# Altium PCB Slave.PcbDoc
Units mil, origin at the board's own origin, x right, y up, seen from the top; angles counter-clockwise.
Board outline 3485.03 x 2510.03 mil, 2 copper layers (Top Layer, Bottom Layer); 55 components, 56 nets, 233 pads, 92 vias.
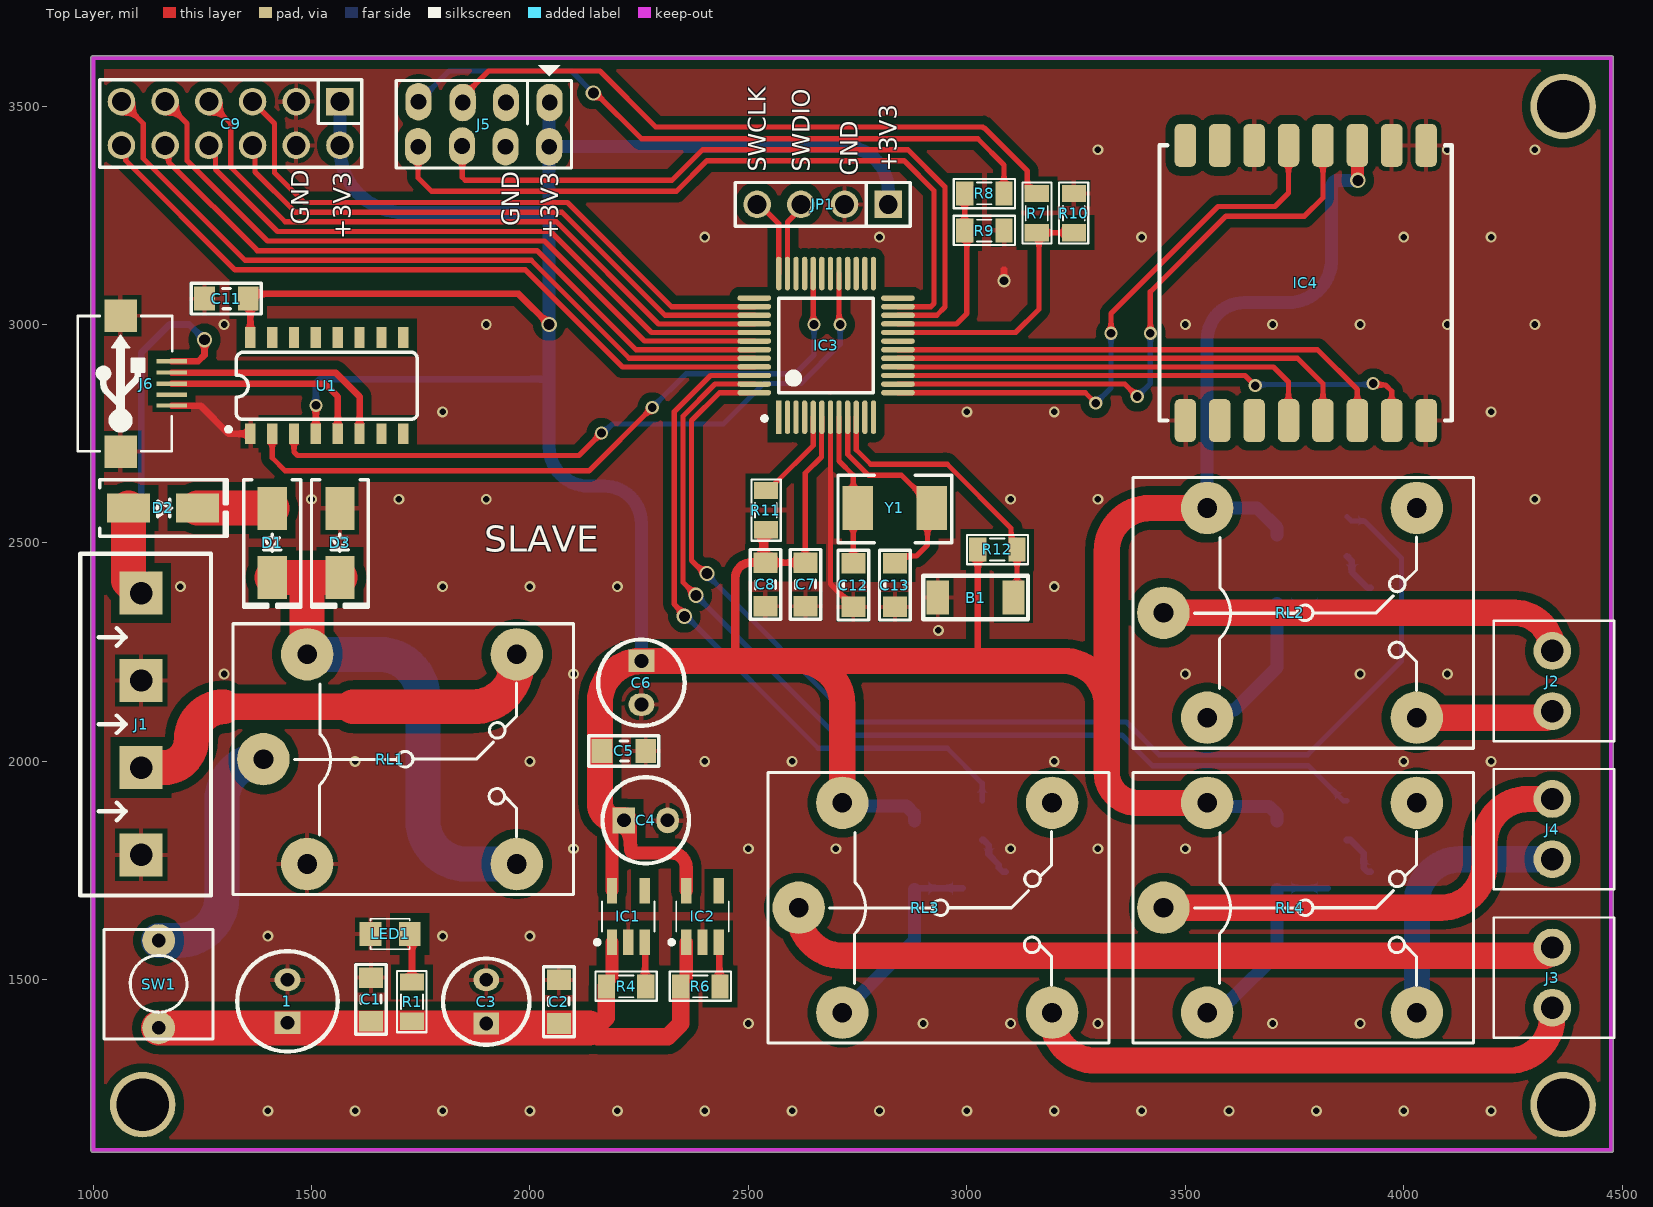
[diagram p0: Top Layer view]
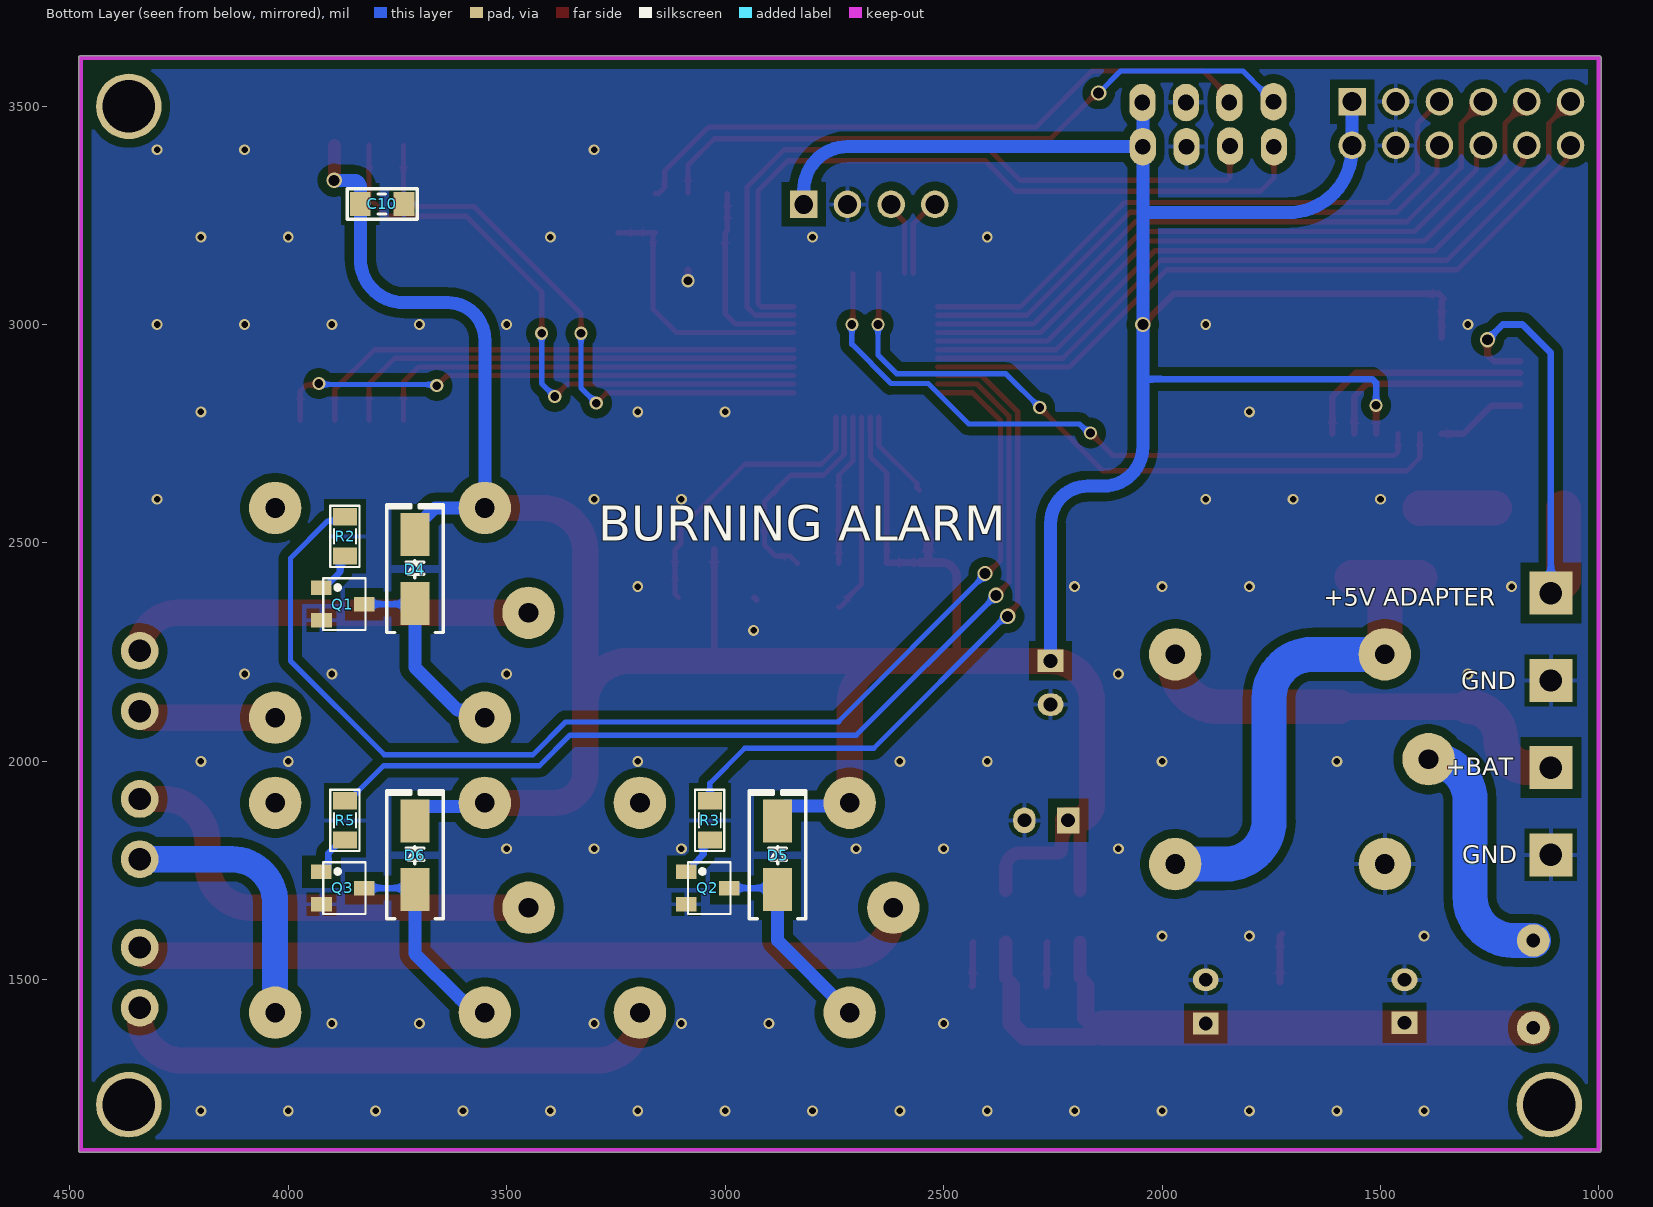
[diagram p1: Bottom Layer view, seen from below]
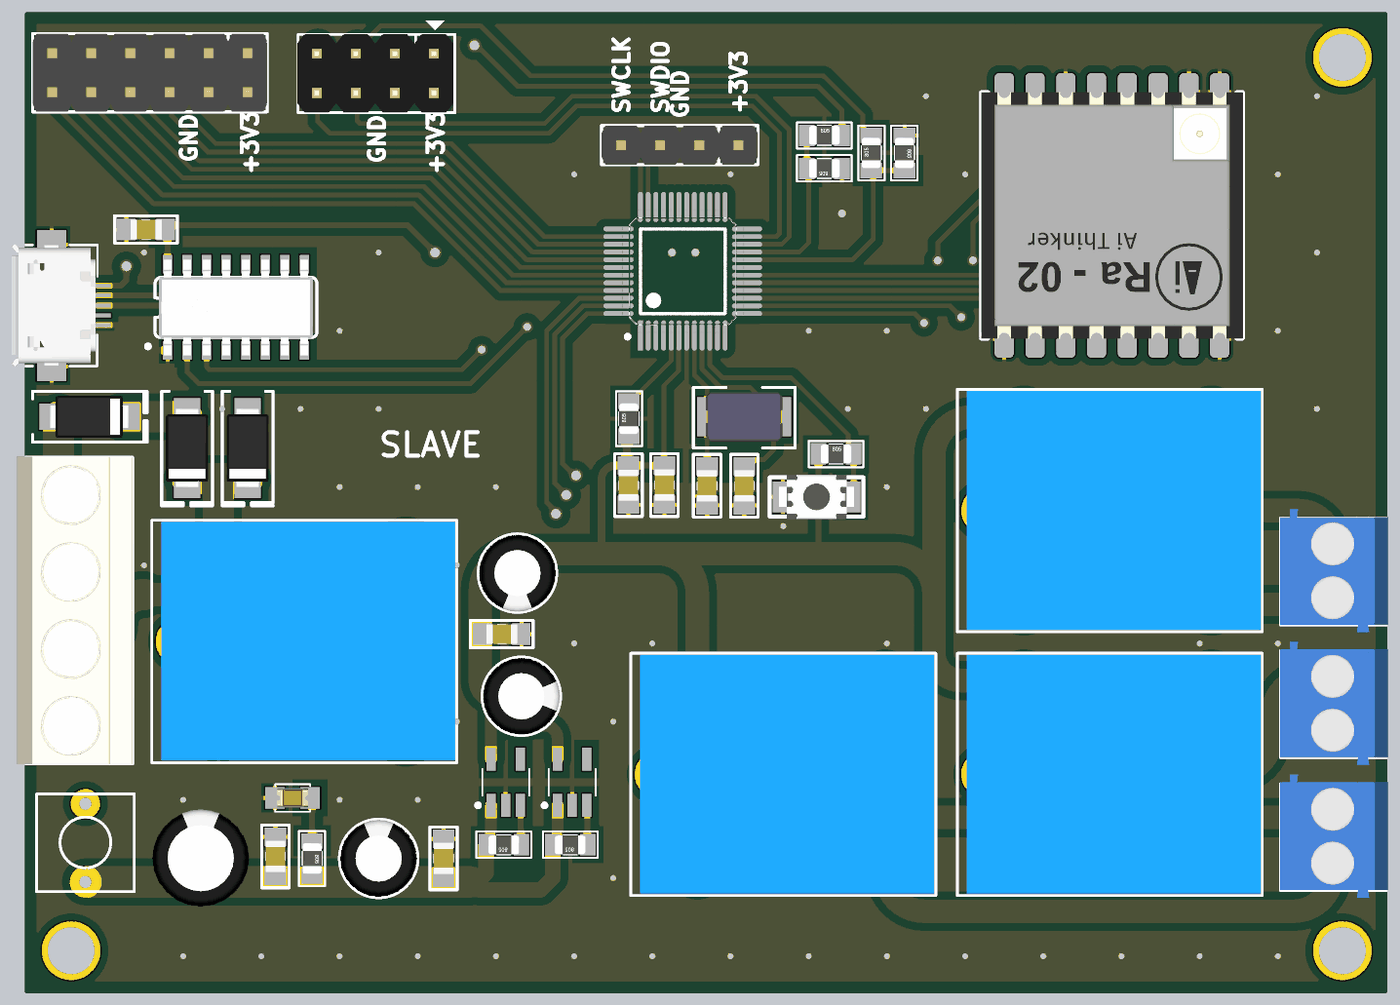
[diagram p2: 3D render of the assembled board from above, using the file's embedded part models]
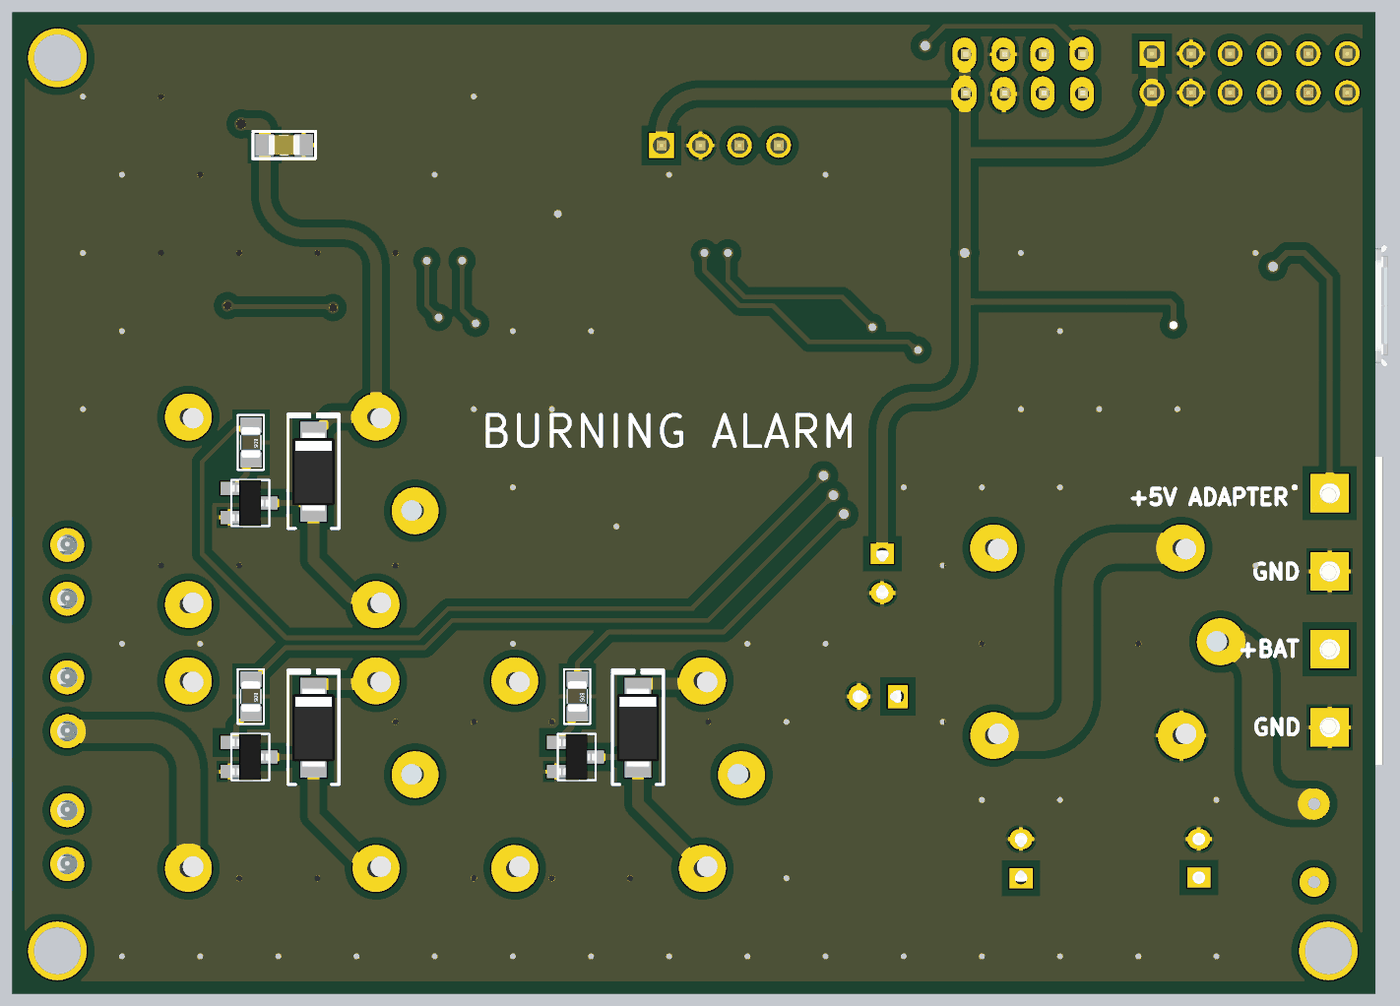
[diagram p3: 3D render of the assembled board from below, using the file's embedded part models]

## Layer stack, top to bottom
Top Solder: solder mask 0.4, Solder Resist, Dk 3.5
Top Layer: signal copper 1.4
Dielectric 1: dielectric 12.6, FR-4, Dk 4.8
Bottom Layer: signal copper 1.4
Bottom Solder: solder mask 0.4, Solder Resist, Dk 3.5

## Board outline
995.65,1112.5 cw(c1000,1115) 994.99,1115 994.99,3610 cw(c1000,3610) 1000,3615.01 4475,3615.01 cw(c4475,3610) 4480.02,3610 4480.02,1110 cw(c4475,1110) 4475,1104.98 1000,1104.98 cw(c1000,1110)

## Design rules (kind name [scope] priority, off if disabled: settings)
Clearance [All] p1: gap=10 ignorepadtopadclearanceinfootprint=FALSE
PolygonConnect [All] p1: thpad.connectstyle=Relief thpad.reliefconductorwidth=10 thpad.reliefentries=4 thpad.polygonreliefangle="90 Angle" thpad.airgapwidth=10 smdpad.connectstyle=Relief smdpad.reliefconductorwidth=10 smdpad.reliefentries=4 smdpad.polygonreliefangle="90 Angle" smdpad.airgapwidth=10 via.connectstyle=Direct via.reliefconductorwidth=10 via.reliefentries=4 via.polygonreliefangle="90 Angle" via.airgapwidth=10
RoutingVias [All] p1: holewidth=25 width=35 viastyle="Through Hole" minholewidth=10 minwidth=25 maxholewidth=100 maxwidth=100
SolderMaskExpansion [All] p1: expansion=4 istentingtop=FALSE
Width [All] p1: maxlimit=100 minlimit=10 preferedwidth=20
30 further rules are at their usual default settings.

## Components (designator, comment, footprint, x,y, rotation, side; value= is the part's Value field where it differs from the comment)
1 "470uF" C8mm 1445,1450.79 r90 top
B1 "Button 3x4x2.5" "Button 3x4x2.5" 3020,2375 r0 top
C1 "100nF" CAP_0805 1635,1455 r90 top value=33p
C2 "100nF" CAP_0805 2065,1450 r90 top value=33p
C3 "100uF" C5mm 1900,1450 r90 top
C4 "100uF" C5mm 2265,1865 r0 top
C5 "100nF" CAP_0805 2215,2025 r0 top value=33p
C6 "100uF" C5mm 2255,2180 r270 top
C7 "4.7uF" CAP_0805 2630,2405 r90 top value=33p
C8 "100nF" CAP_0805 2540,2405 r270 top value=33p
C9 "JP6x2" JP6-D2T 1315,3460 r180 top
C10 "100nF" CAP_0805 3785,3275 r0 bottom value=33p
C11 "100nF" CAP_0805 1305,3060 r0 top value=33p
C12 "22pF" CAP_0805 2741.11,2403.54 r270 top value=33p
C13 "22pF" CAP_0805 2836.11,2403.54 r270 top value=33p
D1 "SS34 Diode 3A 40V" "DIODE SMA" 1410,2500 r270 top
D2 "SS34 Diode 3A 40V" "DIODE SMA" 1160,2580 r0 top
D3 "M7" "DIODE SMA" 1565,2500 r270 top
D4 "M7" "DIODE SMA" 3710,2440 r90 bottom
D5 "M7" "DIODE SMA" 2880,1785 r90 bottom
D6 "M7" "DIODE SMA" 3710,1785 r90 bottom
IC1 "RT9013" SOT23-5 2225,1645 r90 top
IC2 "RT9013" SOT23-5 2395,1645 r90 top
IC3 "STM32G0" STM32G0 2680,2950 r90 top
IC4 "LoRa-02" LoRa-02 3775.63,3095.04 r270 top
J1 "KF4" KF4-5.08 1110,2385 r270 top
J2 "KF2" KF2-3.5 4340,2183.9 r90 top
J3 "KF2" KF2-3.5 4340,1505 r90 top
J4 "KF2" KF2-3.5 4340,1845 r90 top
J5 "Connector 4x2" JP4x2 1894.5,3458.5 r180 top
J6 "USB-5" USB-M1 1180,2864.41 r90 top
JP1 "JP 1x4 2.54" "JP 1x4 DT" 2820,3275 r180 top
LED1 "LED" LED-0805-Red 1725,1605 r180 top value="LED 3 ly Single Colour"
Q1 "C1815" SOT23D 3875,2360 r270 bottom
Q2 "C1815" SOT23D 3040,1710 r270 bottom
Q3 "C1815" SOT23D 3875,1710 r270 bottom
R1 "1k" RES-SMD-0805 1730,1450 r270 top
R2 "1k" RES-SMD-0805 3870,2515 r270 bottom
R3 "1k" RES-SMD-0805 3035,1865 r270 bottom
R4 "10k" RES-SMD-0805 2220,1485 r180 top
R5 "1k" RES-SMD-0805 3870,1865 r270 bottom
R6 "10k" RES-SMD-0805 2390,1485 r180 top
R7 "10k" RES-SMD-0805 3160,3255 r90 top
R8 "10k" RES-SMD-0805 3040,3300 r0 top
R9 "20k" RES-SMD-0805 3040,3215 r180 top
R10 "20k" RES-SMD-0805 3245,3255 r270 top
R11 "10k" RES-SMD-0805 2540,2575 r90 top
R12 "10k" RES-SMD-0805 3070,2485 r0 top
RL1 "Relay 10A/12V" "RELAY 5" 1715,2005 r0 top value="Relay SPDT, 10A, 12V"
RL2 "Relay 10A/12V" "RELAY 5" 3775,2340 r0 top value="Relay SPDT, 10A, 12V"
RL3 "Relay 10A/12V" "RELAY 5" 2940,1665 r0 top value="Relay SPDT, 10A, 12V"
RL4 "Relay 10A/12V" "RELAY 5" 3775,1665 r0 top value="Relay SPDT, 10A, 12V"
SW1 "SW" SW2 1150,1590 r270 top value="SW chip 2 pin"
U1 "CH340C" SO016 1535,2860 r0 top
Y1 "8Mhz" "Thach Anh 2 chan SMD5032" 2835,2580 r180 top value=4Mhz

## Footprints (in the part's own frame and the unit in brackets; to place one, negate y for a bottom-side part, rotate by r counter-clockwise, add the part's x,y. Pads: shape width x height; smd on the part's side, far side on the other; paste and mask are expansions set on the pad)
"Button 3x4x2.5" [mm]
  rect 1.3x2 smd: 1(-2.2,0) 2(2.2,0)
  silkscreen extent -3.05,-1.27 3.05,1.27, body extent -2.45,-1.45 2.45,1.45, height 2
C5mm [mm]
  rect 1.3x1.5 hole 0.8: 1(-1.27,0)
  oval 1.3x1.5 hole 0.8: 2(1.27,0)
  silkscreen extent -2.51,-2.51 2.51,2.51, body extent -2.5,-2.5 2.49,2.5, height 11.01
C8mm [mm]
  rect 1.3x1.5 hole 0.8: 1(-1.25,0)
  oval 1.3x1.5 hole 0.8: 2(1.25,0)
  silkscreen extent -2.92,-2.92 2.92,2.92, body extent -3.15,-3.15 3.16,3.15, height 11.51
CAP_0805 [mm]
  rect 1.2x1.4 smd: 1(-1.27,-0.025) 2(1.27,-0.025)
  silkscreen extent -2.03,-0.91 2.03,0.86, body extent -1.01,-0.66 1.01,0.61, height 0.61
"DIODE SMA" [mm] "SMA"
  rect 2.5x1.7 smd: 1(-2,0) 2(2,0)
  silkscreen extent -3.68,-1.65 3.75,1.65, body extent -2.6,-1.37 2.6,1.37, height 2.4
JP4x2 [mil] "Connector 4x2"
  oval 60x86 hole 36: 1(-150.5,-49.5) 2(-50.5,-49.5) 3(48.5,-49.5) 4(149.5,-51.5) 5(-149.5,51.5) 6(-49.5,51.5) 7(50,50) 8(150.5,51.5)
  silkscreen extent -201,-135 200,101, body extent -197,-100 203,100, height 335
JP6-D2T [mm] "12 pins, dual pin, straight, gold plating"
  rect 1.6x1.6 hole 1.1: 1(-6.35,-1.27)
  round 1.6 hole 1.1: 2(-3.81,-1.27) 3(-1.27,-1.27) 4(1.27,-1.27) 5(3.81,-1.27) 6(6.35,-1.27) 7(6.35,1.27) 8(3.81,1.27) 9(1.27,1.27) 10(-1.27,1.27) 11(-3.81,1.27) 12(-6.35,1.27)
  silkscreen extent -7.62,-2.54 7.62,2.54, body extent -7.62,-2.54 7.62,2.54, height 8.55
"JP 1x4 DT" [mm] "4 pins, 1 row, straight, gold plating"
  rect 1.6x1.6 hole 1.1: 1(0,0)
  round 1.6 hole 1.1: 2(2.54,0) 3(5.08,0) 4(7.62,0)
  silkscreen extent -1.27,-1.27 8.89,1.27, body extent -1.27,-1.27 8.89,1.27, height 8.54
KF2-3.5 [mm] "3,50mm - modular - blue - Horizontal wire entry - Pressure clamp - 8,4mm height - 02p"
  round 2.2 hole 1.3: 1(-1.75,0) 2(1.75,0)
  silkscreen extent -3.5,-3.6 3.5,3.4, body extent -3.95,-3.6 4.05,3.4, height 8.41
KF4-5.08 [mm]
  rect 2.5x2.5 hole 1.3: 1(0,0) 2(5.08,0) 3(10.147,0) 4(15.215,0)
  silkscreen extent -2.29,-3.53 17.58,4.06, body extent -2.36,-3.43 17.64,4.07, height 10
LED-0805-Red [mil]
  rect 50x55 smd: 1(0,0) 2(90,0)
  silkscreen extent 0,-35 90,35, body extent 5,-25 85,25, height 43
LoRa-02 [mm]
  rrect50% 2.5x1.25 smd: 1(-8,7) 2(-8,5) 2(-8,-3) 3(-8,3) 4(-8,1) 5(-8,-1) 7(-8,-5) 8(-8,-7) 9(8,-7) 10(8,-5) 11(8,-3) 12(8,-1) 13(8,1) 14(8,3) 15(8,5) 16(8,7)
  silkscreen extent -8,-8.5 8,8.5, body extent -8,-8.5 8,8.5, height 3.03
"RELAY 5" [mil] "Reley DPDT, 8 pin, 1A, W400mil, L800mil,H 300mil"
  round 120 hole 45: 1(-325,0) 2(255,240) 3(255,-240) 4(-225,-240) 5(-225,240)
  silkscreen extent -395,-310 385,310, body extent -371,-304 381,306, height 602
RES-SMD-0805 [mil]
  rect 39.37x55 smd: 1(-45,0) 2(45,0)
  silkscreen extent -70,-34 70,33, body extent -39,-25 39,25, height 31
SO016 [mm]
  rect 0.6x1.2 smd: 1(-4.445,-2.8) 2(-3.175,-2.8) 3(-1.905,-2.8) 4(-0.635,-2.8) 5(0.635,-2.8) 6(1.905,-2.8) 7(3.175,-2.8) 8(4.445,-2.8) 9(4.445,2.8) 10(3.175,2.8) 11(1.905,2.8) 12(0.635,2.8) 13(-0.635,2.8) 14(-1.905,2.8) 15(-3.175,2.8) 16(-4.445,2.8)
  silkscreen extent -5.84,-2.67 5.26,1.95, body extent -4.99,-3.13 4.99,3.1, height 1.58
SOT23-5 [mm] "SOT23, 5-Leads, Body 3.0x3.0mm (max), Pitch 0.95mm, IPC Medium Density"
  rect 1.5x0.6 smd: 1(-1.5,0.95) 2(-1.5,0) 3(-1.5,-0.95) 4(1.5,-0.95) 5(1.5,0.95)
  silkscreen extent -1.62,-1.52 0.87,1.92, body extent -1.75,-1.52 1.75,1.53, height 1.45
SOT23D [mm] "SOT 23C - 1-3-2 - BCE"
  rect 0.85x1.2 smd: 1(-0.95,-1.25) 2(0.94,-1.245) 3(0,1.25)
  silkscreen extent -1.5,-1.14 1.5,1.32, body extent -1.5,-1.17 1.5,1.33, height 1.06
STM32G0 [mm]
  rect 1.955x0.312 smd paste+0 mask+0: 1(-4.12,2.803)
  rrect100% 1.955x0.312 smd paste+0 mask+0: 2(-4.12,2.303) 3(-4.12,1.803) 4(-4.12,1.303) 5(-4.12,0.803) 6(-4.12,0.303) 7(-4.12,-0.197) 8(-4.12,-0.697) 9(-4.12,-1.197) 10(-4.12,-1.697) 11(-4.12,-2.197) 12(-4.12,-2.697) 25(4.23,-2.697) 26(4.23,-2.197) 27(4.23,-1.697) 28(4.23,-1.197) 29(4.23,-0.697) 30(4.23,-0.197) 31(4.23,0.303) 32(4.23,0.803) 33(4.23,1.303) 34(4.23,1.803) 35(4.23,2.303) 36(4.23,2.803)
  rrect100% 0.312x1.955 smd paste+0 mask+0: 13(-2.695,-4.122) 14(-2.195,-4.122) 15(-1.695,-4.122) 16(-1.195,-4.122) 17(-0.695,-4.122) 18(-0.195,-4.122) 19(0.305,-4.122) 20(0.805,-4.122) 21(1.305,-4.122) 22(1.805,-4.122) 23(2.305,-4.122) 24(2.805,-4.122) 37(2.805,4.228) 38(2.305,4.228) 39(1.805,4.228) 40(1.305,4.228) 41(0.805,4.228) 42(0.305,4.228) 43(-0.195,4.228) 44(-0.695,4.228) 45(-1.195,4.228) 46(-1.695,4.228) 47(-2.195,4.228) 48(-2.695,4.228)
  silkscreen extent -4.32,-2.7 2.81,3.76, body extent -5.6,-5.6 5.71,5.71, height 0.25
SW2 [mil] "SW button 2pin, 250x 250 mil"
  round 75 hole 31: 1(0,0) 2(200,0)
  silkscreen extent -25,-125 225,125
"Thach Anh 2 chan SMD5032" [mil] "DO-214-AA/SMB; 2 C-Bend Leads; Body 5.3 x 3.6 mm, inc. leads (LxW)"
  rect 70x100 smd: 1(-85,0) 2(85,0)
  silkscreen extent -130,-75 130,80, body extent -98,-63 98,63, height 51
USB-M1 [mil]
  rect 10x70 smd: 1(51.18,0) 2(25.59,0) 3(0,0) 4(-25.59,0) 5(-50,0)
  rect 74.8x74.8 smd: 5(-155.51,116.84) 5(155.51,116.84)
  silkscreen extent -155,-1 155,215, body extent -157,5 158,218, height 107

## Part data
1: library part "Cap Pol", "470uF 16V", LatestRevisionDate=17-Jul-2002, LatestRevisionNote="Re-released for DXP Platform.", PackageReference=POLAR0.8, Published=8-Jun-2000, Publisher="Altium Limited"
C1 C2 C5 C7 C8 C10 C11 C12 C13: library part CapSMD, "Capacitor", LatestRevisionDate=17-Jul-2002, LatestRevisionNote="Re-released for DXP Platform.", PackageReference=RAD-0.3, Published=8-Jun-2000, Publisher="Altium Limited"
C3 C4 C6: library part "Cap Pol", "100uF 16V", LatestRevisionDate=17-Jul-2002, LatestRevisionNote="Re-released for DXP Platform.", PackageReference=POLAR0.8, Published=8-Jun-2000, Publisher="Altium Limited"
C9: "WR-PHD 2.54 mm Dual Socket Header", Manufacturer="W¨¹rth Elektronik eiSos GmbH", partNo=61301221821, ComponentLink1 Description=Manufacturer, ComponentLink1URL=http://www.we-online.com, ComponentLink2 Description=Datasheet, ComponentLink2URL=http://katalog.we-online.de/em/datasheet/6130xx21821.pdf, Created by="Karrer Zheng", Created Date="29 March 2013", NoPins=12
D1 D2 D3 D4 D5 D6: library part "Diode M7 ( 4007 )", "Dán", Chung_Loai=Dán, Don_Vi=Con, Ma_Hang=MH000944, Ten_Linh_Kien="Diode M7 1N4007 SMD 1A 1000V"
IC1 IC2: "RT9013-33GB IC REG LINEAR 3.3V 500mA SOT23-5"
J1: Manufacturer="W¨¹rth Elektronik eiSos GmbH", partNo=691133710004, ComponentLink1 Description=Manufacturer, ComponentLink1 URL=http://www.we-online.com, ComponentLink2 Description=Datasheet, ComponentLink2 URL=http://katalog.we-online.de/em/datasheet/6911337100xx.pdf, Created by="Baojun Chen", Created Date=4-Aug-15, NoPins=4
J2 J3 J4: Manufacturer="Würth Elektronik eiSos GmbH", partNo=691103110002, ComponentLink1 Description=Manufacturer, ComponentLink1URL=http://www.we-online.com, ComponentLink2 Description=Datasheet, ComponentLink2URL=http://katalog.we-online.de/em/datasheet/6911031100xx.pdf, Created by="Karrer Zheng", Created Date="29 October 2013", NoPins=2
J5: library part JP4x2
J6: Manufacturer=FCI, Manufacturer Part Number=10118193-0001LF, Supplier Part Number 1=609-4616-1-ND, .Checked PCB=RF, .Checked SCH=MM, .Creator=MM, Category="Connectors, Interconnects", ComponentLink1Description=http://portal.fciconnect.com/Comergent//fci/drawing/10118193.pdf, ComponentLink1URL=http://portal.fciconnect.com/Comergent//fci/drawing/10118193.pdf, Connector Type="USB - micro B", Features="Shielded, Solder Retention", Gender=Receptacle, Ingress Protection=-, Mounting Type="Surface Mount, Right Angle, Horizontal", Number of Contacts=5, Packaging="Cut Tape (CT)", Pricing 1="1=0.46, 10=0.433, 25=0.3712, 50=0.3156, 100=0.3032, 250=0.27224, 500=0.25988 (USD)", RoHS="RoHS Compliant", Specifications="USB 2.0", Stock 1=28642, Supplier 1=Digi-Key
JP1: library part "JP 1x4 2.54 Duc Thang", "Cắm", Chung_Loai=Cắm, Don_Vi=Con, Ma_Hang=MH000903, Ten_Linh_Kien="Jump Đơn Đực 2.54MM 1x40P Thẳng 11MM"
LED1: "LED Single colour Green and Red"
Q1 Q2 Q3: library part 2SC1815, "NPN 600mW, ECB"
R1 R2 R3 R4 R5 R6 R7 R8 R9 R10 R11 R12: library part "Resistor - SMD", "Resistor", Manufacturer="Generic Components", Class=Passive, Published=08/06/2000, Publisher="Altium Hobart Technology Centre"
RL1 RL2 RL3 RL4: library part "Relay 5", "Relay SPDT,10A - 12VDC 5 Pin"
SW1: library part SW2, "Switch button 2 pin"
U1: "USB to serial chip CH340", Package=Package, Availability=Unavailable, Check_prices=https://www.snapeda.com/parts/CH340C/WCH/view-part/5428851/?ref=eda, MF=WCH, MP=CH340C, Price=None, SnapEDA_Link=https://www.snapeda.com/parts/CH340C/WCH/view-part/5428851/?ref=snap
Y1: library part "Thach Anh 2 chan SMD 5032", "Crystal For all Crystal 2pin."

## Free pads (board coordinates)
  round 150 hole 120: 0(1113.47,1214.08) 0(4365,1214.08) 0(4365,3499.08)

## Via types
v1: diameter 25, hole 15, Top Layer to Bottom Layer, tented both sides, 73 vias
v2: diameter 30, hole 20, Top Layer to Bottom Layer, tented both sides, 12 vias
v3: diameter 35, hole 25, Top Layer to Bottom Layer, tented both sides, 7 vias

## Nets (pads, with @x,y where several pads share a name; then routed paths per layer and width w, separated by ;. In a path a pad name is that pad's centre, name@x,y a point inside that pad or via, vN(x,y) a via of type N, cw(c..) or ccw(c..) an arc to the next point about the centre after c; other vN are vias at no path point)
+3.3V: C4.1 C5.1 C6.1 C7.2 C8.1 C9.1 C9.12 C10.2 C11.2 D4.2 D5.2 D6.2 IC1.5 IC2.5 IC3.6 IC4.3 J5.1 J5.5 JP1.1 R11.1 R12.1 RL2.5 RL3.5 RL4.5 U1.4 U1.16 | length 10624.4
  Top Layer w12: C7.2 2630,2456 2630,2660 2667,2697 2667,2754.29 2668.07,2755.36 IC3.6
  Top Layer w15: U1.16 1360,3054 C11.2 1366,3070 1974,3070 v3(2044,3000) ; U1.4 v2(1510,2815) ; C8.1@2554,2455 C7.2@2630,2455 ; 3025,2230 R12.1
  Top Layer w20: 2475,2230 cw(c2475,2235) 2470,2235 2470,2420 cw(c2505,2420) 2505,2455 C8.1@2554,2455 ; C8.1 2535,2459 2535,2525 R11.1
  Top Layer w30: IC1.5 2187.6,1837.6 cw(c2215,1837.6) C4.1 cw(c2215,1850) 2230,1850 2230,1800 ccw(c2240,1800) 2240,1790 2325,1790 cw(c2325,1757.4) 2357.6,1757.4 IC2.5 ; IC4.3 3893.74,3331.26 ccw(c3895,3331.26) v3(3895,3330)
  Top Layer w60: C5.1@2160,2019 2160,1904.08 ccw(c2199.08,1904.08) 2199.08,1865 C4.1 ; C5.1@2160,2024 2160,2135 cw(c2255,2135) C6.1 2475,2230 2615,2230 ; C4.1@2198.84,1865.25 C4.1@2214.98,1865.25 ; RL3.5 2715,2130 ccw(c2615,2130) 2615,2230 ; RL4.5 3390,1905 cw(c3390,1975) 3320,1975 3320,2130 ; RL2.5 3420,2580 ccw(c3420,2480) 3320,2480 3320,2130 ; 2615,2230 3025,2230 3220,2230 cw(c3220,2130) 3320,2130
  Bottom Layer w15: v2(1510,2815) 1510,2866.21 1518.79,2875 2044,2875
  Bottom Layer w30: C9.12 C9.1 ; C9.12@1565.12,3409.99 ccw(c1711.61,3402.67) 1711.61,3256 2044,3256 ; J5.1 ccw(c2045,3507) 2044,3507 J5.5 ; C6.1 2255,2545 ccw(c2170,2545) 2170,2630 2134,2630 cw(c2134,2720) 2044,2720 2044,2875 v3(2044,3000) 2044,3256 ; RL3.5 2722.05,1897.95 2861.54,1897.95 2880,1879.49 D5.2 ; JP1.1 2820,3307 ccw(c2720,3307) 2720,3407 J5.5 ; RL4.5 3557.95,1897.05 3691.54,1897.05 3710,1878.58 D6.2 ; D4.2 3710,2534.49 3664.49,2580 RL2.5 3550,2965 cw(c3635,2965) 3635,3050 3735,3050 ccw(c3735,3150) 3835,3150 C10.2 3835,3315 cw(c3850,3315) 3850,3330 v3(3895,3330) ; 2044,3256 J5.5
+4.2V: D1.2 D3.2 RL1.3 RL1.5 | length 1205.4
  Top Layer w80: D1.2 1490,2421.26 ; RL1.5 1490,2421.26 ; D3.2 1490,2421.26
  Bottom Layer w80: RL1.5 1655,2245 cw(c1655,2145) 1755,2145 1755,1865 ccw(c1855,1865) 1855,1765 RL1.3
+5: D2.1 J1.1 J6.1 | length 1059.3
  Top Layer w15: J6.1 1240.59,2915.59 1255,2930 v3(1255,2965)
  Top Layer w80: D2.1 1081.26,2413.74 J1.1
  Bottom Layer w15: J1.1 1110,2935 1175,3000 1220,3000 v3(1255,2965)
+VBAT: J1.3 RL1.2 | length 1016.7
  Top Layer w60: 1300,2125 1595,2125
  Top Layer w80: J1.3 1160.5,1985.5 ccw(c1160.5,2050) 1225,2050 cw(c1300,2050) 1300,2125 ; 1595,2125 1870,2125 ccw(c1870,2225) 1970,2225 RL1.2
AHT10_SCL: IC3.22 J5.7 | length 1634.3
  Top Layer w12: J5.7 1845,3408 1845,3337.03 1852.03,3330 2325,3330 2395,3400 2865,3400 2950,3315 2950,3040 2931.06,3021.06 IC3.22
AHT10_SDA: IC3.23 J5.8 | length 1666.2
  Top Layer w12: J5.8 1744,3336 1775,3305 2335,3305 2405,3375 2855.97,3375 2925,3305.97 2925,3047.78 2917.97,3040.75 IC3.23
CH340_RXD: IC3.29 U1.3 | length 1563.1
  Top Layer w12: U1.3 1460,2708.14 1468,2700.14 2112.16,2700.14 v2(2163.51,2751.49) ; IC3.29 2707.5,3116.5 2707.5,3002.5 v2(2710,3000)
  Bottom Layer w12: v2(2163.51,2751.49) 2168.16,2751.49 2189.17,2772.5 2442.5,2772.5 2535,2865 2620,2865 2710,2955 v2(2710,3000)
CH340_TXD: IC3.32 U1.2 | length 1604.2
  Top Layer w12: U1.2 1410,2695 1440,2665 2135,2665 v2(2280,2810) ; IC3.32 2648.39,3001.61 v2(2650,3000)
  Bottom Layer w12: v2(2280,2810) 2357,2887 2607,2887 2650,2930 v2(2650,3000)
D_N: J6.2 U1.6 | length 538
  Top Layer w15: J6.2 1555,2890 1610,2835 U1.6
D_P: J6.3 U1.5 | length 477.4
  Top Layer w15: J6.3 1530.59,2864.41 1560,2835 U1.5
GND: 1.2 B1.1 C1.2 C2.2 C3.2 C4.2 C5.2 C6.2 C7.1 C8.2 C9.2 C9.11 C10.1 C11.1 C12.2 C13.2 D3.1 IC1.2 IC2.2 IC3.7 IC4.1 IC4.2 IC4.9 IC4.16 J1.2 J1.4 J5.2 J5.6 J6.5 JP1.2 LED1.2 Q1.2 Q2.2 Q3.2 R9.1 R10.1 RL1.4 U1.1 | length 697.1
  Top Layer w12: IC3.7 2687.76,2405.89 2718.55,2375.09 2718.55,2371.16 2736.17,2353.54 C12.2
  Top Layer w15: J6.5@1180,2814.41 1245.59,2814.41 1310.24,2749.76 U1.1 ; B1.1@2928.39,2370 B1.1 ; v2(3085,3100) 3085,3125
  other v1: 1400,1200 1600,1200 1800,1200 2000,1200 2200,1200 2400,1200 2600,1200 2800,1200 3000,1200 3200,1200 3400,1200 3600,1200 3800,1200 4000,1200 4200,1200 2500,1400 2900,1400 3100,1400 3300,1400 3700,1400 3900,1400 1400,1600 1800,1600 2000,1600 2100,1800 2500,1800 2700,1800 3100,1800 3300,1800 3500,1800 1600,2000 2000,2000 2400,2000 2600,2000 3200,2000 4000,2000 4200,2000 1300,2200 2100,2200 3500,2200 3900,2200 4100,2200 2935,2300 1200,2400 1800,2400 2000,2400 2200,2400 3200,2400 1500,2600 1700,2600 1900,2600 3100,2600 3300,2600 4300,2600 1800,2800 3000,2800 3200,2800 4200,2800 1300,3000 1900,3000 3500,3000 3700,3000 3900,3000 4100,3000 4300,3000 2400,3200 2800,3200 3400,3200 4000,3200 4200,3200 3300,3400 4100,3400 4300,3400
IO0: C9.3 IC3.38 | length 1409
  Top Layer w12: C9.3 1415,3460 1415,3347.23 1483.23,3279 2086,3279 2324.25,3040.75 IC3.38
IO1: C9.10 IC3.39 | length 1341.8
  Top Layer w12: C9.10 1370.61,3404.39 1370.61,3349.39 1463,3257 2073,3257 2308.94,3021.06 IC3.39
IO2: C9.4 IC3.40 | length 1517.8
  Top Layer w12: C9.4 1315,3460 1315,3360 1440,3235 2060.46,3235 2294.08,3001.38 IC3.40
IO3: C9.9 IC3.41 | length 1449.4
  Top Layer w12: C9.9 1265,3396.2 1280,3381.2 1280,3355 1422,3213 2047,3213 2278.31,2981.69 IC3.41
IO4: C9.5 IC3.42 | length 1625.3
  Top Layer w12: C9.5 1215,3460 1215,3375 1399,3191 2032.89,3191 2261.88,2962.01 IC3.42
IO5: C9.8 IC3.43 | length 1559.8
  Top Layer w12: C9.8 1173,3402 1173,3372 1376,3169 2016,3169 2242.68,2942.32 IC3.43
IO6: C9.6 IC3.44 | length 1738.7
  Top Layer w12: C9.6 1115,3460 1115,3380 1348,3147 2003,3147 2227.36,2922.64 IC3.44
IO7: C9.7 IC3.45 | length 1673.2
  Top Layer w12: C9.7 1074.76,3400.24 1074.76,3375.24 1325,3125 1990,3125 2212.05,2902.95 IC3.45
LORA_IO0: IC3.13 IC4.5 | length 1311.5
  Top Layer w12: IC3.13 3271.1,2843.9 v2(3295,2820) ; v2(3330,2980) 3330,3025 3575,3270 3705,3270 3736.26,3301.26 IC4.5
  Bottom Layer w12: v2(3295,2820) 3330,2855 v2(3330,2980)
LORA_MISO: IC3.17 IC4.13 | length 1081.1
  Top Layer w12: IC3.17 3756.62,2922.64 3815,2864.26 IC4.13
LORA_MOSI: IC3.18 IC4.14 | length 1160.3
  Top Layer w12: IC3.18 3802.68,2942.32 3893.74,2851.26 IC4.14
LORA_NSS: IC3.15 IC4.15 | length 1216.4
  Top Layer w12: IC3.15 3636.6,2883.27 3659.87,2860 v2(3660,2860) ; v2(3930,2865) 3933.44,2861.56 3958.22,2861.56 3972.48,2847.29 IC4.15
  Bottom Layer w12: v2(3660,2860) 3662.5,2862.5 3927.5,2862.5 v2(3930,2865)
LORA_RST: IC3.14 IC4.4 | length 1416
  Top Layer w12: IC3.14 3361.42,2863.58 v2(3390,2835) ; v2(3420,2980) 3420,3075 3593,3248 3773,3248 3815,3290 IC4.4
  Bottom Layer w12: v2(3390,2835) 3420,2865 v2(3420,2980)
LORA_SCK: IC3.16 IC4.12 | length 996.8
  Top Layer w12: IC3.16 3702.05,2902.95 3736.26,2868.74 IC4.12
MQ7_ADC: IC3.21 R8.1 R9.2 | length 444.6
  Top Layer w12: IC3.21 2976.38,3001.38 3000,3025 3000,3210 R9.2 R8.1
MQ7_EXTI: IC3.20 R7.1 R10.2 | length 606.8
  Top Layer w12: IC3.20 3111.69,2981.69 3165,3035 3165,3205 R7.1 R10.2
NetD1_1: D1.1 D2.2 | length 172
  Top Layer w80: D2.2 1408.74,2580 cw(c1408.74,2578.74) D1.1
NetD4_1: D4.1 Q1.3 RL2.4 | length 470.2
  Bottom Layer w15: D4.1 3711.26,2360 Q1.3
  Bottom Layer w30: RL2.4 3567.22,2117.22 3612.22,2117.22 3710,2215 D4.1
NetD5_1: D5.1 Q2.3 RL3.4 | length 461.9
  Bottom Layer w15: D5.1 2883.74,1710 Q2.3
  Bottom Layer w30: RL3.4 2880,1590 D5.1
NetD6_1: D6.1 Q3.3 RL4.4 | length 479.5
  Bottom Layer w15: D6.1 3713.74,1710 Q3.3
  Bottom Layer w30: RL4.4 3574.35,1425 3606.1,1456.75 3606.75,1456.75 3710,1560 D6.1
NetIC1_3: IC1.3 R4.1 | length 102
  Top Layer w15: IC1.3 2263.7,1584.65 2263.7,1486.3 R4.1
NetIC2_3: IC2.3 R6.1 | length 102
  Top Layer w15: IC2.3 2433.7,1584.65 2433.7,1486.3 R6.1
NetIC3_5: IC3.5 R11.2 | length 206.5
  Top Layer w12: R11.2@2555,2620 2561.5,2626.5 2561.5,2636.5 2648.39,2723.39 IC3.5
NetJ2_1: J2.1 RL2.3 | length 318.6
  Top Layer w60: RL2.3 4325,2100 ccw(c4325,2115) J2.1
NetJ2_2: J2.2 RL2.1 | length 939.8
  Top Layer w60: RL2.1 4252.8,2340 cw(c4252.8,2252.8) J2.2
NetJ3_1: J3.1 RL3.3 | length 1290.3
  Top Layer w60: RL3.3 3195,1415 ccw(c3295,1415) 3295,1315 4240,1315 ccw(c4240,1415) 4340,1415 J3.1
NetJ3_2: J3.2 RL3.1 | length 1802.9
  Top Layer w60: RL3.1 2615,1655 ccw(c2715,1655) 2715,1555 4321.1,1555 ccw(c4321.1,1573.9) J3.2
NetJ4_1: J4.1 RL4.3 | length 618.2
  Bottom Layer w60: RL4.3 4030,1676.1 cw(c4130,1676.1) 4130,1776.1 J4.1
NetJ4_2: J4.2 RL4.1 | length 1053.1
  Top Layer w60: RL4.1 4085,1665 ccw(c4085,1765) 4185,1765 4185,1813.9 cw(c4285,1813.9) 4285,1913.9 J4.2
NetJ5_3: J5.3 R7.2 | length 1502.6
  Top Layer w12: J5.3 1846,3521 1905,3580 2160,3580 2288,3452 3036.18,3452 3038.18,3450 3040,3450 3138.5,3351.5 3138.5,3313.68 3152.19,3300 R7.2
  Bottom Layer w12: J5.3 J5.3@1846,3521
NetJ5_4: J5.4 R8.2 | length 1554.4
  Top Layer w12: J5.4 J5.4@1767.17,3532.18 ; v3(2145,3530) 2150,3530 2255,3425 3025,3425 3085,3365 R8.2
  Bottom Layer w12: J5.4 J5.4@1767.17,3532.18 ; J5.4@1767.18,3532.18 1815,3580 2095,3580 v3(2145,3530)
NetLED1_1: LED1.1 R1.1 | length 112.1
  Top Layer w15: LED1.1 1730,1600 R1.1
NetQ1_1: Q1.1 R2.2 | length 99.1
  Bottom Layer w15: R2.2 3881.1,2458.9 3881.1,2433.62 3917.32,2397.4 Q1.1
NetQ2_1: Q2.1 R3.2 | length 100.7
  Bottom Layer w15: R3.2 3037.83,1820 3050.01,1807.82 3050.01,1786.6 3073.09,1763.52 3073.09,1756.63 3082.32,1747.4 Q2.1
NetQ3_1: Q3.1 R5.2 | length 103.7
  Bottom Layer w15: R5.2 3877.81,1820 3908.09,1789.73 3908.09,1756.63 3917.32,1747.4 Q3.1
NetRL1_1: RL1.1 SW1.1 | length 571.3
  Bottom Layer w80: SW1.1 1195,1590 ccw(c1195,1690) 1295,1690 1295,1910 cw(c1390,1910) RL1.1
OSC_IN: C12.1 IC3.8 Y1.2 | length 347.8
  Top Layer w12: IC3.8 2707.44,2687.56 2740,2655 2740,2580 2740,2453.64 C12.1
OSC_OUT: C13.1 IC3.9 Y1.1 | length 504.5
  Top Layer w12: IC3.9 2727.13,2702.87 2775,2655 2850,2655 2910,2595 2910,2580 2910,2495 2885,2470 2851.57,2470 C13.1
RL1: IC3.46 R3.1 | length 1575.6
  Top Layer w12: v3(2353.29,2331.92) 2353.29,2336.91 2330,2360.2 2330,2800 2413.27,2883.27 IC3.46
  Bottom Layer w12: v3(2353.29,2331.92) 2358.08,2331.92 2660,2030 2955,2030 3035,1950 R3.1
RL2: IC3.48 R2.1 | length 2788.7
  Top Layer w12: v3(2405,2430) 2400,2430 2370,2460 2370,2780 2433.9,2843.9 IC3.48
  Bottom Layer w12: v3(2405,2430) 2405,2427 2740,2092 ; 2740,2090 3365,2090 3440,2015 3780,2015 3995,2230 3995,2465 3910,2550 3880,2550 R2.1
RL3: IC3.47 R5.1 | length 2301.1
  Top Layer w12: v3(2380,2380) 2350,2410 2350,2790 2423.58,2863.58 IC3.47
  Bottom Layer w12: v3(2380,2380) 2700,2060 3355,2060 3425,1990 3782.19,1990 3862.19,1910 R5.1
RST: B1.2 IC3.10 R12.2 | length 671.3
  Top Layer w12: IC3.10 2746.81,2713.19 2780,2680 2945,2680 ; 2945.03,2680.03 2954.97,2680.03 3101.31,2533.69 3101.31,2498.69 R12.2 3115,2383.38 B1.2
SWCLK: IC3.36 JP1.4 | length 181.9
  Top Layer w12: JP1.4 2525,3275 2569.65,3230.35 IC3.36
SWDIO: IC3.35 JP1.3 | length 171.1
  Top Layer w12: IC3.35 2589.33,3234.33 2620,3265 JP1.3
VCC: 1.1 C1.1 C2.1 C3.1 IC1.1 IC2.1 R1.2 R4.2 R6.2 SW1.2 | length 1634.3
  Top Layer w30: R4.2 2175,1492.81 2187.6,1505.41 IC1.1 ; R6.2 2345,1492.81 2357.6,1505.41 IC2.1
  Top Layer w40: R4.2 2175,1413.43 2151.57,1390 2135,1390 2155,1370 2315,1370 2345,1400 R6.2
  Top Layer w80: SW1.2 2135,1390
pads on no net: IC1.4 IC2.4 IC3.1 IC3.2 IC3.3 IC3.4 IC3.11 IC3.12 IC3.19 IC3.24 IC3.25 IC3.26 IC3.27 IC3.28 IC3.30 IC3.31 IC3.33 IC3.34 IC3.37 IC4.7 IC4.8 IC4.10 IC4.11 J6.4 RL2.2 RL3.2 RL4.2 U1.7 U1.8 U1.9 U1.10 U1.11 U1.12 U1.13 U1.14 U1.15

## Polygon pours and split planes (outlines as drawn)
GND on Top Layer "100" (solid, pour order 1): 1000,3610 4475,3610 4475,1110 1000,1110
GND on Bottom Layer "100" (solid, pour order 2): 1000,3610 4475,3610 4475,1110 1000,1110

## Keep-outs
Keep-Out Layer:
  lines w10: 1000,1110 4475,1110 4475,3610 4465,3610 1000,3610 1000,1115

## Silkscreen, mask and mechanical layers (free items; w line width, h text height)
Top Overlay:
  text "SWCLK" at 2540,3350 h40 r90
  text "SWDIO" at 2640,3350 h40 r90
  text "+3V3" at 2840,3350 h40 r90
  text "GND" at 2750,3340 h40 r90
  text "GND" at 1493.7,3227.77 h40 r90
  text "GND" at 1975,3225 h40 r90
  text "+3V3" at 1590,3195 h40 r90
  text "+3V3" at 2065,3195 h40 r90
  text "SLAVE" at 1895,2480 h60
Bottom Overlay:
  text "BURNING ALARM" at 3290,2505 h80
  text "+5V ADAPTER" at 1629.95,2356.15 h40
  text "GND" at 1315,2165 h40
  text "+BAT" at 1350.44,1967.77 h40
  text "GND" at 1312.56,1767.22 h40